# Allegro board controller3.brd
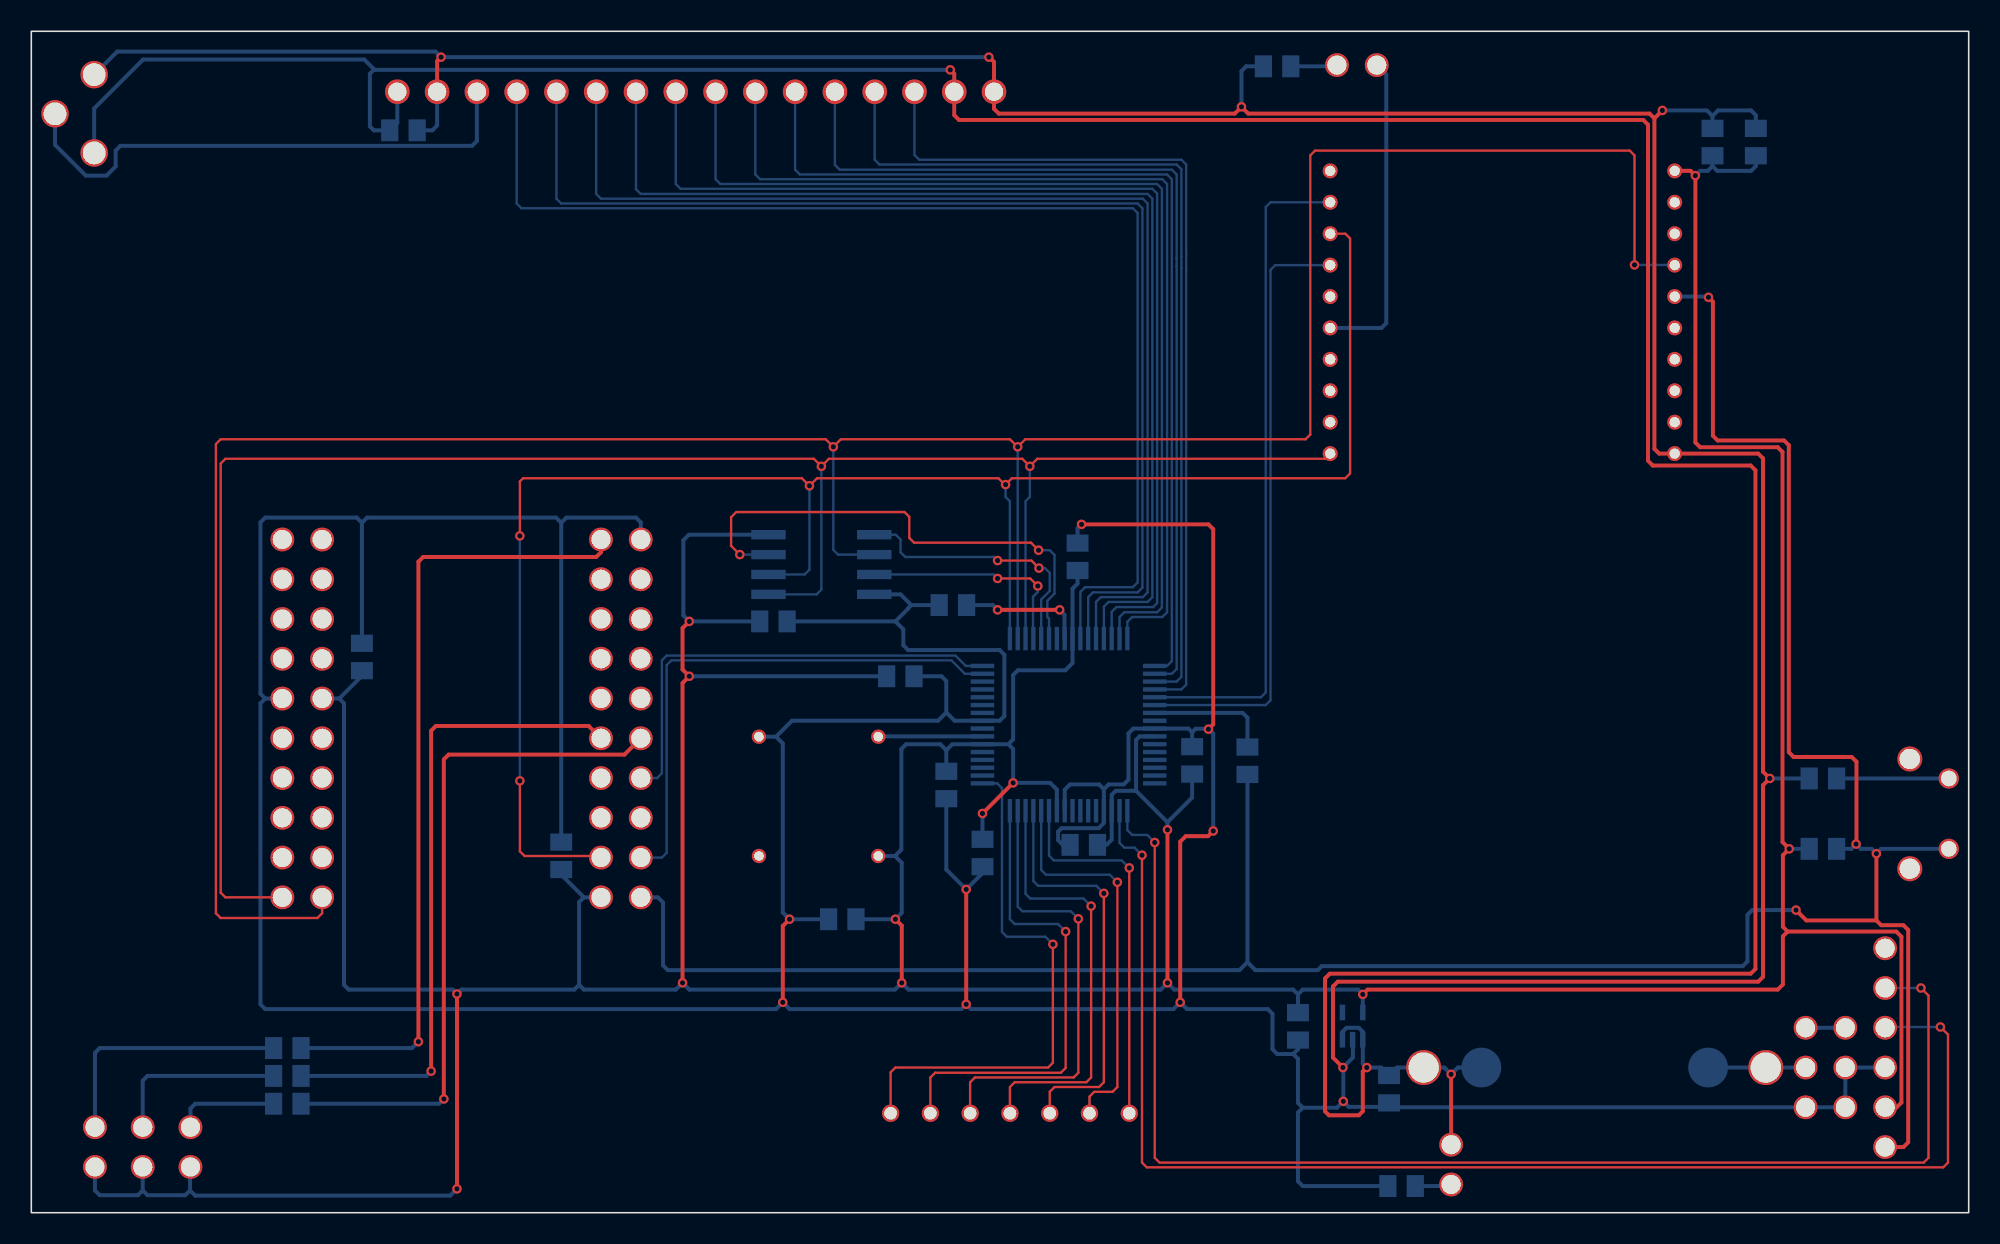
[diagram p0: board, top side]
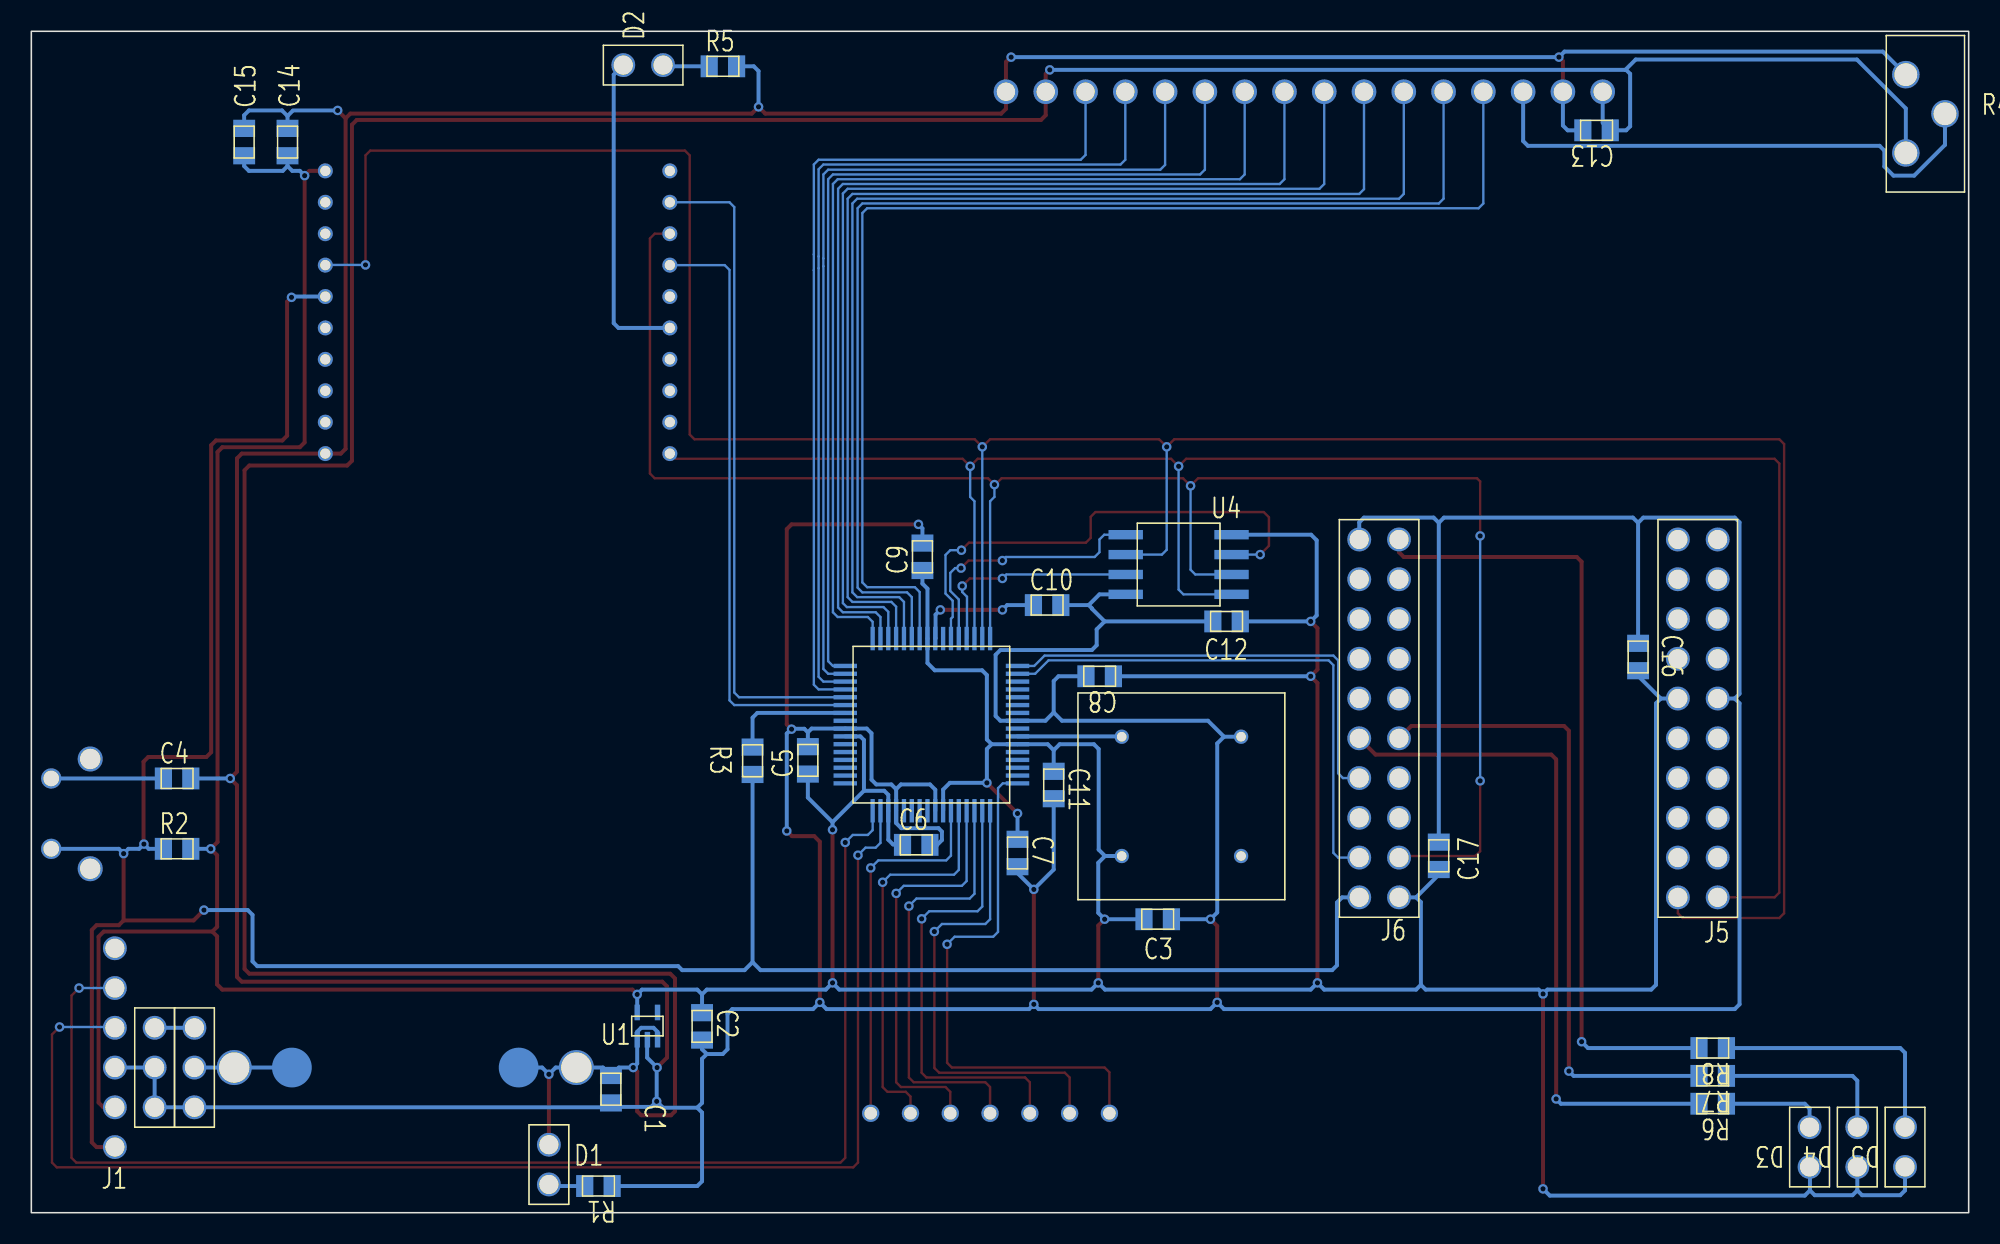
[diagram p1: board, bottom side, seen from below]

Outline 123.7 x 75.46 mm; copper layers: TOP, BOTTOM. Coordinates in mm from the lower left corner of the outline.
Outline path: rectangle 0,0 123.7,75.46

## Placement (name value [footprint] x y rotation side)
C1  1u  [C_0805]  86.69 8.76 270 bottom
C2  1u  [C_0805]  80.87 12.78 270 bottom
C3  0.1u  [C_0805]  52.65 18.75 180 bottom
C4  0.1u  [C_0805]  115.27 27.74 180 bottom
C5  0.1u  [C_0805]  74.12 28.02 90 bottom
C6  0.1u  [C_0805]  68.07 23.5 180 bottom
C7  0.1u  [C_0805]  60.73 23.85 270 bottom
C8  0.1u  [C_0805]  54.61 34.26 0 bottom
C9  0.1u  [C_0805]  66.8 41.02 90 bottom
C10  10u  [C_0805]  59.72 38.81 180 bottom
C11  0.1u  [C_0805]  58.42 28.19 270 bottom
C12  0.1u  [C_0805]  46.51 37.77 0 bottom
C13  0.1u  [C_0805]  22.89 69.14 0 bottom
C14  1u  [C_0805]  107.34 67.51 90 bottom
C15  8.2p  [C_0805]  110.11 67.51 90 bottom
C16  0.1u  [C_0805]  21.11 34.62 90 bottom
C17  0.1u  [C_0805]  33.83 21.92 90 bottom
D1  -  [LED]  90.65 4.34 180 bottom
D2  -  [LED]  85.9 73.3 90 bottom
D3  -  [LED]  10.16 2.92 0 bottom
D4  -  [LED]  7.11 2.92 0 bottom
D5  -  [LED]  4.06 2.92 0 bottom
DC1  DC  [HEADER_3_BY_1]  115.82 11.81 180 bottom
F1  CON4  [FUSE]  111.91 5.97 180 bottom
J1  CON6  [HEADER_6_90]  118.36 4.19 0 bottom
J2  NHD-0420DZ-NSW-BBW  [CHAR_LCD]  23.37 71.6 0 top
J3  COM-08653  [KEYPAD]  54.86 6.35 0 top
J4  XBeeWifi  [XBEE_RPSMA]  104.93 66.55 0 bottom
J5  WIZ812MJ_J1  [HEADER_10_BY_2]  16.03 20.14 0 bottom
J6  WIZ812MJ_J2  [HEADER_10_BY_2]  36.37 20.14 0 bottom
R1  200  [R_0805]  86.61 1.7 0 bottom
R2  10k  [R_0805]  115.27 23.24 180 bottom
R3  470  [R_0805]  77.65 29.74 270 bottom
R4  POT  [TH_POT]  4.01 72.69 180 bottom
R5  200  [R_0805]  80.42 73.23 180 bottom
R6  200  [R_0805]  15.47 6.96 0 bottom
R7  200  [R_0805]  15.47 8.74 0 bottom
R8  200  [R_0805]  15.47 10.52 0 bottom
SW1  SW SPDT  [HEADER_3_BY_1]  113.28 11.81 180 bottom
SW2  SW SPST  [SPST]  122.4 27.74 270 bottom
U1  LD59015  [3_3_REGULATOR]  85.01 11.05 90 bottom
U2  ACHL-8.000MHZ-EK  [CLK]  54.08 22.78 90 bottom
U3  PIC24FJ256GB206  [PIC]  71.73 34.93 180 bottom
U4  S25FL216K0PMFI040  [FLASH]  53.82 43.31 180 bottom

## Library data of the parts
C1-C17 = C
D1-D5 = LED
DC1 = DC
F1 = CON4_0
J1 = CON6
J2 = NHD-0420DZ-NSW-BBW_0
J3 = COM-08653_0
J4 = XBeeWifi_1
J5 = WIZ812MJ_J1_1
J6 = WIZ812MJ_J2
R1-R3 R5-R8 = R
R4 = POT
SW1 = SW SPDT
SW2 = SW PUSHBUTTON-SPST
U1 = LD59015_0
U2 = ACHL-8.000MHZ-EK
U3 = PIC24FJ256GB206_14
U4 = S25FL216K0PMFI040

## Footprints (pads in the part's own frame, mm; a bottom-side part is the same pattern mirrored in y, then rotated)
3_3_REGULATOR
  rect 1x0.35 smd: 1(0,0) 2(0,-0.65) 3(0,-1.3) 4(1.74,-1.3) 5(1.74,0)
C_0805
  rect 1.1x1.4 smd: 1(0,0) 2(1.75,0)
CHAR_LCD
  round 1.575 hole 1.168: 1(0,0) 2(2.54,0) 3(5.08,0) 4(7.62,0) 5(10.16,0) 6(12.7,0) 7(15.24,0) 8(17.78,0) 9(20.32,0) 10(22.86,0) 11(25.4,0) 12(27.94,0) 13(30.48,0) 14(33.02,0) 15(35.56,0) 16(38.1,0)
CLK
  round 0.914 hole 0.61: 1(0,-7.62) 4(7.62,-7.62) 5(7.62,0) 8(0,0)
FLASH
  rect 2.2x0.6 smd: 1(0,0) 2(0,-1.27) 3(0,-2.54) 4(0,-3.81) 5(6.756,-3.81) 6(6.756,-2.54) 7(6.756,-1.27) 8(6.756,0)
FUSE
  round 2.235 hole 1.93: 1(1.168,3.302) 4(23.012,3.302)
  round 2.54 smd: 2(4.851,3.302) 3(19.329,3.302)
HEADER_3_BY_1
  round 1.524 hole 1.219: 1(0,0) 2(0,-2.54) 3(0,-5.08)
HEADER_6_90
  round 1.524 hole 1.219: 1(0,0) 2(0,-2.54) 3(0,-5.08) 4(0,-7.62) 5(0,-10.16) 6(0,-12.7)
HEADER_10_BY_2
  round 1.524 hole 1.219: 1(0,0) 2(2.54,0) 3(0,-2.54) 4(2.54,-2.54) 5(0,-5.08) 6(2.54,-5.08) 7(0,-7.62) 8(2.54,-7.62) 9(0,-10.16) 10(2.54,-10.16) 11(0,-12.7) 12(2.54,-12.7) 13(0,-15.24) 14(2.54,-15.24) 15(0,-17.78) 16(2.54,-17.78) 17(0,-20.32) 18(2.54,-20.32) 19(0,-22.86) 20(2.54,-22.86)
KEYPAD
  round 1.107 hole 0.802: 1(0,0) 2(2.54,0) 3(5.08,0) 4(7.62,0) 5(10.16,0) 6(12.7,0) 7(15.24,0)
LED
  round 1.524 hole 1.219: 1(0,0) 2(0,-2.54)
PIC
  rect 1.499x0.279 smd: 1(0,0) 2(0,-0.5) 3(0,-1) 4(0,-1.5) 5(0,-2.001) 6(0,-2.501) 7(0,-3.001) 8(0,-3.501) 9(0,-4.001) 10(0,-4.501) 11(0,-5.001) 12(0,-5.501) 13(0,-6.002) 14(0,-6.502) 15(0,-7.002) 16(0,-7.502) 33(10.998,-7.502) 34(10.998,-7.002) 35(10.998,-6.502) 36(10.998,-6.002) 37(10.998,-5.501) 38(10.998,-5.001) 39(10.998,-4.501) 40(10.998,-4.001) 41(10.998,-3.501) 42(10.998,-3.001) 43(10.998,-2.501) 44(10.998,-2.001) 45(10.998,-1.5) 46(10.998,-1) 47(10.998,-0.5) 48(10.998,0)
  rect 0.279x1.499 smd: 17(1.748,-9.25) 18(2.248,-9.25) 19(2.748,-9.25) 20(3.248,-9.25) 21(3.749,-9.25) 22(4.249,-9.25) 23(4.749,-9.25) 24(5.249,-9.25) 25(5.749,-9.25) 26(6.249,-9.25) 27(6.749,-9.25) 28(7.249,-9.25) 29(7.75,-9.25) 30(8.25,-9.25) 31(8.75,-9.25) 32(9.25,-9.25) 49(9.25,1.748) 50(8.75,1.748) 51(8.25,1.748) 52(7.75,1.748) 53(7.25,1.748) 54(6.75,1.748) 55(6.249,1.748) 56(5.749,1.748) 57(5.249,1.748) 58(4.749,1.748) 59(4.249,1.748) 60(3.749,1.748) 61(3.249,1.748) 62(2.749,1.748) 63(2.248,1.748) 64(1.748,1.748)
R_0805
  rect 1.1x1.4 smd: 1(0,0) 2(1.75,0)
SPST
  round 1.6 hole 1.295: (-1.245,2.464) (5.766,2.464)
  round 1.295 hole 0.991: 1(0,-0.025) 2(4.496,-0.025)
TH_POT
  round 1.757 hole 1.452: 1(0,0) 2(2.5,-2.5) 3(0,-5)
XBEE_RPSMA
  round 0.957 hole 0.653: 1(0,0) 2(0,2.007) 3(0,4.013) 4(0,6.02) 5(0,8.026) 6(0,10.033) 7(0,12.04) 8(0,14.046) 9(0,16.053) 10(0,18.059) 11(-21.996,18.059) 12(-21.996,16.053) 13(-21.996,14.046) 14(-21.996,12.04) 15(-21.996,10.033) 16(-21.996,8.026) 17(-21.996,6.02) 18(-21.996,4.013) 19(-21.996,2.007) 20(-21.996,0)

## Nets
GND: C1.2 C2.2 C3.2 C4.2 C5.2 C6.2 C7.2 C8.2 C9.2 C10.2 C11.2 C12.2 C13.2 C14.2 C15.2 C16.2 C17.2 DC1.2(GND1) DC1.3(GND2) J1.3 J2.2(VDD) J2.16(K) J4.10(GND) J5.11(GND) J6.20(GND) R1.1 R4.1(A) R5.2 SW1.3(NO) U1.2(GND) U2.4(GND) U3.9(VSS1) U3.20(AVSS) U3.25(VSS2) U3.41(VSS3) U4.4(GND)
VCC_3_3: C2.1 C3.1 C5.1 C6.1 C7.1 C8.1 C9.1 C11.1 C12.1 C14.1 C15.1 C16.1 C17.1 D3.1(ANODE) D4.1(ANODE) D5.1(ANODE) J1.2 J4.1(VCC) J5.12(3V3D) J6.1(3V3D) R2.2 U1.5(OUT) U2.8(VDD) U3.10(VDD1) U3.19(AVDD) U3.26(VDD2) U3.38(VDD3) U3.57(ENVREG) U4.8(VCC)
VCC_5: C1.1 C13.1 D1.1(ANODE) F1.3 F1.4 J2.1(VSS) J2.15(A) R4.3(B) U1.1(IN) U1.3(EN)
CLKI: U2.5(OUTPUT) U3.39(OSCI/CLKI/CN23/RC12)
ETH_LINKED: J6.19(LINK_LED#) R8.2
ETH_RX: J6.9(RX_LED) R7.2
ETH_TX: J6.10(TX_LED) R6.2
KEY_C1: J3.3(C1) U3.31(SDA2/RP10/PMA9/CN17/RF4)
KEY_C2: J3.1(C2) U3.33(RP16/USBID/CN71/RF3)
KEY_C3: J3.5(C3) U3.29(AN14/CTPLS/RP14/PMA1/CN32/RB14)
KEY_R1: J3.2(R1) U3.32(SCL2/RP17/PMA8/CN18/RF5)
KEY_R2: J3.7(R2) U3.27(TCK/AN12/CTEDG2/PMA11/CN30/RB12)
KEY_R3: J3.6(R3) U3.28(TDI/AN13/CTEDG1/PMA10/CN31/RB13)
KEY_R4: J3.4(R4) U3.30(AN15/RP29/REFO/PMA0/CN12/RB15)
LCD_D0: J2.7(DB0) U3.61(PMD1/CN59/RE1)
LCD_D1: J2.8(DB1) U3.62(PMD2/CN60/RE2)
LCD_D2: J2.9(DB2) U3.63(PMD3/CN61/RE3)
LCD_D3: J2.10(DB3) U3.64(PMD4/CN62/RE4)
LCD_D4: J2.11(DB4) U3.1(PMD5/CN63/RE5)
LCD_D5: J2.12(DB5) U3.2(SCL3/PMD6/CN64/RE6)
LCD_D6: J2.13(DB6) U3.3(SDA3/PMD7/CN65/RE7)
LCD_D7: J2.14(DB7) U3.4(C1IND/RP21/PMA5/CN8/RG6)
LCD_E: J2.6(E) U3.60(PMD0/CN58/RE0)
LCD_RS: J2.4(RS) U3.58(VBUSST/VCMPST1/VBUSVLD/CN68/RF0)
LCD_RW: J2.5(RW) U3.59(VCMPST2/SESSVLD/CN69/RF1)
MCLR#: R3.1 U3.7(MCLR)
MEM_HOLD#: U3.54(C3INB/CN15/RD6) U4.7(HOLD#)
MEM_WP#: U3.52(RP25/PMWR/CN13/RD4) U4.3(WP#)
PGEC: J1.5 U3.17(PGEC2/AN6/RP6/CN24/RB6)
PGED: J1.4 U3.18(PGED2/AN7/RP7/RCV/CN25/RB7)
RESET#: J1.1 J4.5(RESET#) J6.2(RESET#) R2.1 R3.2 SW2.2
SPI_INT_ETH: J6.8(INT#) U3.48(SOSCO/SCLKI/T1CK/C3INC/RPI37/CN)
SPI_INT_WIFI: J4.19(DIO1/AD1/SPI_ATTN#) U3.5(C1INC/RP26/PMA4/CN9/RG7)
SPI_MISO: J4.4(DIO12/SPI_MISO) J5.2(MISO) U3.50(DPH/RP23/PMACK1/CN51/RD2) U4.2(SO)
SPI_MOSI: J4.11(DIO4/SPI_MOSI) J5.1(MOSI) U3.51(RP22/PMBE0/CN52/RD3) U4.5(SI)
SPI_SCLK: J4.18(DIO2/AD2/SPI_CLK) J6.3(SCLK) U3.49(VCPCON/RP24/VBUSCHG/CN50/RD1) U4.6(SCLK)
SPI_SS_ETH: J6.4(SCS#) U3.47(SOSCI/C3IND/CN1/RC13)
SPI_SS_MEM: U3.53(RP20/PMRD/CN14/RD5) U4.1(CS#)
SPI_SS_WIFI: J4.17(DIO3/AD3/SPI_SSEL#) U3.6(C2IND/RP19/PMA3/CN10/RG8)
XBEE_ASSOCIATE: D2.1(ANODE) J4.15(DIO5/ASSOCIATE)
N68755: DC1.1(VCC) SW1.1(NC)
N68999: F1.1 F1.2 SW1.2(COMMON)
N84818: C4.1 SW2.1
N101898: J2.3(VO) R4.2(WIPER)
N361926: D1.2(CATHODE) R1.2
N411592: C10.1 U3.56(VCAP)
N430324: D2.2(CATHODE) R5.1
N459572: D5.2(CATHODE) R8.1
N459710: D4.2(CATHODE) R7.1
N459850: D3.2(CATHODE) R6.1

Pads without a net: J1 6; J4 2 3 6 7 8 9 12 13 14 16 20; J5 3 4 5 6 7 8 9 10 13 14 15 16 17 18 19 20; J6 5 6 7 11 12 13 14 15 16 17 18; U1 4; U2 1; U3 8 11 12 13 14 15 16 21 22 23 24 34 35 36 37 40 42 43 44 45 46 55

## Via types
v1: diameter 0.61, hole 0.33, TOP to BOTTOM, 67 vias

## Routing (per net, layer and track width the routed paths; a pad name or vN(x,y) marks a point on that pad's centre or on a via; arc(x,y) is an arc through that point)
GND: length 581.4
  TOP w0.254: v1(26.16,73.81) 25.91,73.56 J2.2 ; v1(67.06,43.97) 75.16,43.97 75.46,43.66 75.46,31.19 v1(75.16,30.89) ; v1(48.41,18.75) 47.98,18.31 v1(47.98,13.44) ; v1(75.46,24.38) 75.13,24.05 73.71,24.05 73.36,23.7 v1(73.36,13.44) ; 103.63,69.9 103.33,70.21 77.7,70.21 v1(77.27,70.64) 76.84,70.21 61.77,70.21 61.47,70.51 J2.16 61.47,73.51 61.16,73.81 v1(61.14,73.81) ; 103.63,69.9 103.63,48.79 103.94,48.49 J4.10 110.26,48.49 110.57,48.18 110.57,28.17 v1(111,27.74) 110.57,27.31 110.57,15.06 110.26,14.76 83.41,14.76 83.11,14.45 83.11,9.91 v1(83.74,9.27) ; 103.63,69.9 v1(104.14,70.41) ; v1(59.69,20.65) v1(59.69,13.31)
  BOTTOM w0.152: 106.98,70.41 107.01,70.38
  BOTTOM w0.254: 68.48,27.05 U3.20 68.48,24.89 68.15,24.56 65.78,24.56 65.56,24.34 65.56,23.8 65.86,23.5 C6.2 ; 68.48,27.05 68.79,27.36 69.75,27.36 70.05,27.66 70.05,30.62 70.36,30.92 U3.9 73.88,30.92 74.12,30.68 ; 68.48,27.05 68.18,27.36 66.32,27.36 65.98,27.02 U3.25 ; C11.2 58.42,21.92 v1(59.69,20.65) 60.73,21.69 C7.2 ; C8.2 58.12,34.26 58.42,33.96 58.42,31.95 ; 80.57,10.13 79.55,10.13 79.25,10.44 79.25,12.7 78.94,13 73.79,13 v1(73.36,13.44) 72.92,13 59.99,13 v1(59.69,13.31) 59.39,13 48.41,13 v1(47.98,13.44) 47.55,13 14.94,13 14.63,13.31 14.63,32.54 14.94,32.84 ; 80.57,10.13 80.87,9.83 80.87,7.01 81.18,6.71 ; 80.57,10.13 80.87,10.44 C2.2 ; 21.11,44.07 C16.2 ; 21.11,44.07 20.78,44.4 14.94,44.4 14.63,44.09 14.63,33.15 14.94,32.84 ; 21.11,44.07 21.44,44.4 33.5,44.4 33.83,44.07 ; U1.2 84.38,11.03 84.38,9.91 v1(83.74,9.27) 83.77,9.25 v1(83.77,7.11) ; 81.18,6.71 80.87,6.4 80.87,2.01 81.18,1.7 R1.1 ; 81.18,6.71 83.36,6.71 v1(83.77,7.11) ; 58.42,31.95 58.95,31.42 U3.41 61.82,31.42 62.13,31.73 62.13,35.64 61.82,35.94 55.98,35.94 55.68,36.25 55.68,37.26 55.17,37.77 ; 58.42,31.95 57.89,31.42 48.57,31.42 47.55,30.4 ; C9.2 66.8,43.71 v1(67.06,43.97) ; 56.18,38.81 55.98,38.61 55.98,38.58 55.17,37.77 ; 56.18,38.81 55.5,39.5 U4.4 ; 56.18,38.81 C10.2 ; C3.2 v1(48.41,18.75) 47.98,19.18 47.98,29.97 47.55,30.4 ; v1(83.77,7.11) 84.12,6.76 86.43,6.76 C1.2 86.97,6.73 SW1.3 DC1.3 DC1.2 J1.3 ; v1(75.46,24.38) 75.46,30.61 75.16,30.91 74.35,30.91 74.12,30.68 ; 55.17,37.77 C12.2 ; C4.2 v1(111,27.74) ; 47.55,30.4 U2.4 ; v1(77.27,70.64) 77.27,72.92 77.57,73.23 R5.2 ; 74.12,30.68 C5.2 ; C13.2 25.6,69.14 25.91,69.44 J2.2 ; v1(104.14,70.41) 106.98,70.41 ; 33.83,44.07 34.16,44.4 38.61,44.4 38.91,44.09 J6.20 ; 33.83,44.07 C17.2 ; 14.94,32.84 J5.11 ; 107.01,70.38 107.34,70.05 ; 107.34,70.05 107.7,70.41 109.8,70.41 110.11,70.1 C15.2 ; 107.34,70.05 C14.2 ; R4.1 5.49,74.17 25.81,74.17 v1(26.16,73.81) v1(61.14,73.81)
VCC_3_3: length 385.9
  TOP w0.254: J4.1 105.94,66.55 v1(106.25,66.24) 106.25,49.2 106.55,48.9 111.51,48.9 111.81,48.59 111.81,23.67 v1(112.24,23.24) 111.84,22.83 111.84,18.26 112.14,17.96 ; v1(72.54,24.46) v1(72.54,14.68) ; 112.14,17.96 111.84,17.65 111.84,14.58 111.51,14.25 85.32,14.25 v1(85.01,13.94) ; 112.14,17.96 119.08,17.96 119.41,17.63 119.41,7.04 119.1,6.73 J1.2 ; v1(55.58,14.68) 55.58,18.34 v1(55.17,18.75) ; v1(27.18,13.97) v1(27.18,1.52) ; v1(42.01,37.77) 41.58,37.34 41.58,34.7 v1(42.01,34.26) 41.58,33.83 v1(41.58,14.68) ; v1(60.73,25.5) v1(62.69,27.46)
  BOTTOM w0.254: D5.1 4.06,1.42 4.37,1.12 6.81,1.12 7.11,1.42 ; 35.28,20.14 34.98,19.84 34.98,14.55 ; 35.28,20.14 J6.1 ; 35.28,20.14 33.83,21.59 C17.1 ; 10.13,1.42 10.46,1.09 26.75,1.09 v1(27.18,1.52) ; 10.13,1.42 10.13,2.9 D3.1 ; 10.13,1.42 9.83,1.12 7.42,1.12 7.11,1.42 ; 58.42,29.54 58.8,29.92 U3.38 62.38,29.92 ; 58.42,29.54 58.04,29.92 55.85,29.92 55.55,29.62 55.55,23.19 55.14,22.78 ; 58.42,29.54 C11.1 ; C14.1 107.34,66.85 ; 107.34,66.85 107.65,66.55 109.8,66.55 110.11,66.85 C15.1 ; 107.34,66.85 107.04,66.55 106.55,66.55 v1(106.25,66.24) ; C3.1 v1(55.17,18.75) 55.58,19.15 55.58,22.35 55.14,22.78 ; J5.12 19.66,32.84 ; 19.66,32.84 19.96,32.54 19.96,14.55 20.27,14.25 26.9,14.25 v1(27.18,13.97) 27.46,14.25 34.67,14.25 34.98,14.55 ; 19.66,32.84 21.11,34.29 C16.1 ; 62.38,29.92 62.69,30.23 62.69,34.34 62.99,34.65 66.01,34.65 66.48,35.11 U3.57 66.48,39.86 66.8,40.18 C9.1 ; 62.38,29.92 62.69,29.62 v1(62.69,27.46) 65.05,27.46 65.48,27.03 U3.26 ; C12.1 v1(42.01,37.77) 41.63,38.15 41.63,42.95 41.99,43.31 U4.8 ; U3.10 70.76,30.42 70.54,30.2 70.54,26.95 ; C8.1 v1(42.01,34.26) ; C5.1 74.12,26.52 72.54,24.94 ; C7.1 v1(60.73,25.5) ; 70.54,26.95 69.24,26.95 68.98,26.69 U3.19 68.98,23.83 68.68,23.52 68.1,23.52 C6.1 ; 70.54,26.95 72.54,24.94 ; 55.14,22.78 U2.8 ; 72.54,24.94 v1(72.54,24.46) ; C2.1 80.87,13.94 ; 80.87,13.94 80.57,14.25 72.97,14.25 v1(72.54,14.68) 72.11,14.25 56.01,14.25 v1(55.58,14.68) 55.14,14.25 42.01,14.25 v1(41.58,14.68) 41.15,14.25 35.28,14.25 34.98,14.55 ; 80.87,13.94 81.18,14.25 84.71,14.25 v1(85.01,13.94) U1.5 ; 7.11,1.42 D4.1 ; R2.2 v1(112.24,23.24)
VCC_5: length 233.6
  TOP w0.254: v1(85.27,9.27) 85.01,9.02 85.01,6.48 84.76,6.22 82.85,6.22 82.6,6.48 82.6,14.96 82.91,15.27 109.78,15.27 110.08,15.57 110.08,47.42 109.78,47.73 103.53,47.73 103.23,48.03 103.23,69.49 102.92,69.8 59.23,69.8 58.93,70.1 J2.15 58.93,72.75 v1(58.67,73) ; D1.1 v1(90.65,8.84)
  BOTTOM w0.254: 21.92,73 21.87,73 21.62,72.75 21.62,69.39 21.87,69.14 C13.1 23.37,69.62 J2.1 ; 21.92,73 21.26,73.66 7.14,73.66 4.01,70.54 R4.3 ; 21.92,73 v1(58.67,73) ; F1.3 91.08,9.27 v1(90.65,8.84) 90.22,9.27 F1.4 87.2,9.27 C1.1 86.18,9.27 v1(85.27,9.27) 85.01,9.53 U1.1 85.01,11.56 84.76,11.81 83.97,11.81 83.71,11.55 U1.3
CLKI: length 6.7
  BOTTOM w0.254: U2.5 54.1,30.42 U3.39
ETH_LINKED: length 51
  TOP w0.254: v1(24.71,10.92) 24.71,41.58 25.02,41.88 36.07,41.88 36.37,42.19 J6.19
  BOTTOM w0.254: v1(24.71,10.92) 24.31,10.52 R8.2
ETH_RX: length 41.5
  TOP w0.254: v1(25.53,9.04) 25.53,30.78 25.83,31.09 35.59,31.09 J6.9
  BOTTOM w0.254: R7.2 25.22,8.74 v1(25.53,9.04)
ETH_TX: length 44.1
  TOP w0.254: J6.10 37.87,29.26 26.64,29.26 26.34,28.96 v1(26.34,7.26)
  BOTTOM w0.254: v1(26.34,7.26) 26.04,6.96 R6.2
KEY_C1: length 29.3
  TOP w0.152: J3.3 59.94,8.33 60.25,8.64 66.55,8.64 66.85,8.94 v1(66.85,18.77)
  BOTTOM w0.152: U3.31 62.98,19.56 63.28,19.25 66.37,19.25 v1(66.85,18.77)
KEY_C2: length 34.9
  TOP w0.152: J3.1 54.86,8.97 55.17,9.27 64.92,9.27 65.23,9.58 v1(65.23,17.15)
  BOTTOM w0.152: U3.33 61.67,27.42 61.98,27.12 61.98,17.93 62.28,17.63 64.74,17.63 v1(65.23,17.15)
KEY_C3: length 26.5
  TOP w0.152: v1(68.48,20.4) 68.48,8.33 68.17,8.03 65.33,8.03 65.02,7.72 J3.5
  BOTTOM w0.152: v1(68.48,20.4) 68,20.88 64.28,20.88 63.98,21.18 U3.29
KEY_R1: length 30.7
  TOP w0.152: v1(66.04,17.96) 66.04,9.25 65.74,8.94 57.71,8.94 57.4,8.64 J3.2
  BOTTOM w0.152: U3.32 62.48,18.75 62.78,18.44 65.56,18.44 v1(66.04,17.96)
KEY_R2: length 24
  TOP w0.152: v1(70.1,22.02) J3.7
  BOTTOM w0.152: U3.27 64.98,22.81 65.29,22.5 69.62,22.5 v1(70.1,22.02)
KEY_R3: length 25.1
  TOP w0.152: J3.6 67.56,7.42 67.87,7.72 69.04,7.72 69.34,8.03 v1(69.34,21.11)
  BOTTOM w0.152: v1(69.34,21.11) 68.86,21.59 64.78,21.59 64.48,21.89 U3.28
KEY_R4: length 27.9
  TOP w0.152: v1(67.67,19.58) 67.67,8.64 67.36,8.33 62.79,8.33 62.48,8.03 J3.4
  BOTTOM w0.152: v1(67.67,19.58) 67.18,20.07 63.78,20.07 63.48,20.37 U3.30
LCD_D0: length 70.3
  BOTTOM w0.152: U3.61 68.48,38.71 68.79,39.01 71.27,39.01 71.58,39.32 71.58,64.77 71.27,65.07 38.91,65.07 38.61,65.38 J2.7
LCD_D1: length 67.9
  BOTTOM w0.152: U3.62 68.98,38.38 69.29,38.68 71.63,38.68 71.88,38.94 71.88,65.1 71.58,65.41 41.45,65.41 41.15,65.71 J2.8
LCD_D2: length 65.4
  BOTTOM w0.152: J2.9 43.69,66.01 43.99,65.71 71.88,65.71 72.19,65.41 72.19,38.66 71.88,38.35 69.79,38.35 69.48,38.05 U3.63
LCD_D3: length 63
  BOTTOM w0.152: U3.64 69.98,37.74 70.29,38.05 72.21,38.05 72.52,38.35 72.52,65.71 72.21,66.01 46.53,66.01 46.23,66.32 J2.10
LCD_D4: length 61.3
  BOTTOM w0.152: U3.1 72.52,34.93 72.82,35.23 72.82,66.01 72.52,66.32 49.07,66.32 48.77,66.62 J2.11
LCD_D5: length 59.9
  BOTTOM w0.152: J2.12 51.31,66.93 51.61,66.62 72.82,66.62 73.13,66.32 73.13,60.96 73.13,34.73 72.82,34.42 U3.2
LCD_D6: length 58.4
  BOTTOM w0.152: J2.13 53.85,67.26 54.15,66.95 73.13,66.95 73.43,66.65 73.43,61.09 73.43,34.23 73.13,33.92 U3.3
LCD_D7: length 57
  BOTTOM w0.152: J2.14 56.39,67.56 56.69,67.26 73.43,67.26 73.74,66.95 73.74,61.21 73.74,61.21 73.74,60.2 73.74,60.2 73.74,33.73 73.43,33.42 U3.4
LCD_E: length 72.7
  BOTTOM w0.152: J2.6 36.07,65.07 36.37,64.77 70.97,64.77 71.27,64.47 71.27,39.62 70.97,39.32 68.29,39.32 67.98,39.01 U3.60
LCD_RS: length 77.5
  BOTTOM w0.152: J2.4 30.99,64.47 31.29,64.16 70.33,64.16 70.64,63.86 70.64,40.26 70.33,39.95 67.29,39.95 66.98,39.65 U3.58
LCD_RW: length 75.1
  BOTTOM w0.152: U3.59 67.48,39.32 67.79,39.62 70.64,39.62 70.94,39.93 70.94,64.16 70.64,64.47 33.83,64.47 33.53,64.77 J2.5
MCLR#: length 7.9
  BOTTOM w0.254: U3.7 77.34,31.92 77.65,31.62 R3.1
MEM_HOLD#: length 32.7
  TOP w0.152: v1(45.24,42.04) 44.68,42.6 44.68,44.42 45.01,44.75 55.75,44.75 56.06,44.45 56.06,43.1 56.36,42.8 63.83,42.8 v1(64.31,42.32)
  BOTTOM w0.152: U3.54 64.98,37.94 64.87,38.05 64.87,39.09 65.33,39.55 65.33,42.01 65.02,42.32 v1(64.31,42.32) ; U4.7 v1(45.24,42.04)
MEM_WP#: length 14.2
  TOP w0.152: v1(61.7,40.51) 63.78,40.51 v1(64.26,40.03)
  BOTTOM w0.152: v1(61.7,40.51) 61.44,40.77 U4.3 ; U3.52 63.96,36.7 63.96,39.34 64.26,39.65 v1(64.26,40.03)
PGEC: length 86.4
  TOP w0.152: v1(120.65,14.35) 121.13,13.87 121.13,3.51 120.83,3.2 72.03,3.2 71.73,3.51 v1(71.73,23.65)
  BOTTOM w0.152: v1(120.65,14.35) J1.5 ; v1(71.73,23.65) 71.25,24.13 70.29,24.13 69.98,24.43 U3.17
PGED: length 87.6
  TOP w0.152: v1(70.92,22.83) 70.92,3.2 71.22,2.9 122.07,2.9 122.38,3.2 122.38,11.38 v1(121.89,11.86)
  BOTTOM w0.152: v1(121.89,11.86) 118.41,11.86 J1.4 ; U3.18 69.48,23.62 69.79,23.32 70.43,23.32 v1(70.92,22.83)
RESET#: length 174.3
  TOP w0.254: v1(107.09,58.47) 107.37,58.19 107.37,49.63 107.67,49.33 111.91,49.33 112.22,49.02 112.22,29.41 112.52,29.11 116.23,29.11 116.54,28.8 116.54,23.57 v1(116.51,23.55) ; 117.81,18.67 118.11,18.36 119.53,18.36 119.84,18.06 119.84,4.5 119.53,4.19 J1.1 ; 117.81,18.67 v1(117.81,22.94) ; 117.81,18.67 113.33,18.67 v1(112.67,19.33)
  BOTTOM w0.254: R2.1 116.21,23.24 v1(116.51,23.55) 116.81,23.24 117.5,23.24 v1(117.81,22.94) 118.11,23.24 SW2.2 ; R3.2 77.65,16 ; 77.65,16 78.16,15.49 82.14,15.49 82.4,15.75 109.27,15.75 109.58,16.05 109.58,19.02 109.88,19.33 v1(112.67,19.33) ; 77.65,16 77.14,15.49 40.64,15.49 40.34,15.8 40.34,19.81 40,20.14 J6.2 ; v1(107.09,58.47) 107.04,58.52 J4.5
SPI_INT_ETH: length 29.6
  BOTTOM w0.152: J6.8 39.95,27.76 40.26,28.07 40.26,35.28 40.56,35.59 59,35.59 59.66,34.93 U3.48
SPI_INT_WIFI: length 42.5
  BOTTOM w0.152: U3.5 78.51,32.92 78.82,33.23 78.82,64.24 79.12,64.54 J4.19
SPI_MISO: length 178.9
  TOP w0.152: J5.2 18.57,19.13 18.26,18.82 12.09,18.82 11.79,19.13 11.79,49.1 12.09,49.4 50.72,49.4 v1(51.21,48.92) 51.69,49.4 62.48,49.4 62.97,48.92 v1(62.98,48.92) 63.46,49.4 81.36,49.4 81.66,49.71 81.66,67.54 81.97,67.84 102.06,67.84 102.36,67.54 v1(102.36,60.54)
  BOTTOM w0.152: J4.4 104.91,60.54 v1(102.36,60.54) ; v1(51.21,48.92) 51.21,42.34 51.51,42.04 U4.2 ; v1(62.98,48.92) U3.50
SPI_MOSI: length 125.9
  TOP w0.152: J5.1 12.4,20.14 12.09,20.45 12.09,47.85 12.4,48.16 49.96,48.16 v1(50.44,47.68) 50.93,48.16 63.27,48.16 v1(63.75,47.68) 64.24,48.16 82.6,48.16 J4.11
  BOTTOM w0.152: U3.51 63.48,45.45 63.75,45.72 v1(63.75,47.68) ; U4.5 50.14,39.5 50.44,39.8 v1(50.44,47.68)
SPI_SCLK: length 117.4
  TOP w0.152: J6.3 36.27,22.78 31.5,22.78 31.19,23.09 v1(31.19,27.58) ; v1(31.19,43.23) 31.19,46.71 31.39,46.91 49.2,46.91 v1(49.68,46.43) 50.17,46.91 61.75,46.91 62.15,46.51 v1(62.2,46.51) 62.61,46.91 83.9,46.91 84.2,47.22 84.2,62.23 83.9,62.53 J4.18
  BOTTOM w0.152: v1(62.2,46.51) 62.2,45.72 62.48,45.45 U3.49 ; v1(49.68,46.43) 49.68,41.07 49.38,40.77 U4.6 ; v1(31.19,43.23) v1(31.19,27.58)
SPI_SS_ETH: length 34.4
  BOTTOM w0.152: U3.47 59.61,34.42 58.75,35.28 40.87,35.28 40.56,34.98 40.56,22.99 40.26,22.68 J6.4
SPI_SS_MEM: length 17.1
  TOP w0.152: v1(64.34,41.17) 63.86,41.66 v1(61.7,41.66)
  BOTTOM w0.152: U3.53 64.48,39.17 65.02,39.71 65.02,40.87 64.72,41.17 v1(64.34,41.17) ; U4.1 55.19,43.31 55.5,43 55.5,42.19 55.8,41.88 61.47,41.88 v1(61.7,41.66)
SPI_SS_WIFI: length 38.9
  BOTTOM w0.152: J4.17 79.43,60.53 79.12,60.22 79.12,32.73 78.82,32.42 U3.6
XBEE_ASSOCIATE: length 20.4
  BOTTOM w0.254: J4.15 86.21,56.52 86.51,56.82 86.51,72.69 D2.1
N68755: length 2.5
  BOTTOM w0.254: DC1.1 SW1.1
N68999: length 6.2
  BOTTOM w0.254: SW1.2 F1.1 F1.2
N84818: length 7.2
  BOTTOM w0.254: SW2.1 C4.1
N101898: length 34.4
  BOTTOM w0.254: J2.3 28.45,68.45 28.14,68.15 5.69,68.15 5.38,67.84 5.38,66.83 4.8,66.24 3.48,66.24 1.51,68.21 R4.2
N361926: length 2.3
  BOTTOM w0.254: D1.2 90.55,1.7 R1.2
N411592: length 8
  TOP w0.254: v1(61.7,38.51) v1(65.66,38.51)
  BOTTOM w0.254: C10.1 61.39,38.81 v1(61.7,38.51) ; U3.56 65.96,36.69 65.96,38.2 v1(65.66,38.51)
N430324: length 3
  BOTTOM w0.254: D2.2 83.29,73.23 R5.1
N459572: length 16.3
  BOTTOM w0.254: D5.2 4.06,10.21 4.37,10.52 R8.1
N459710: length 11.5
  BOTTOM w0.254: R7.1 7.42,8.74 7.11,8.43 D4.2
N459850: length 6.6
  BOTTOM w0.254: D3.2 10.16,6.65 10.46,6.96 R6.1
